# Altium PCB STM32-Flasher.PcbDoc
Units mil, origin at the board's own origin, x right, y up, seen from the top; angles counter-clockwise.
Board outline 2620 x 1320 mil, 2 copper layers (Top Layer, Bottom Layer); 21 components, 12 nets, 110 pads, 0 vias.
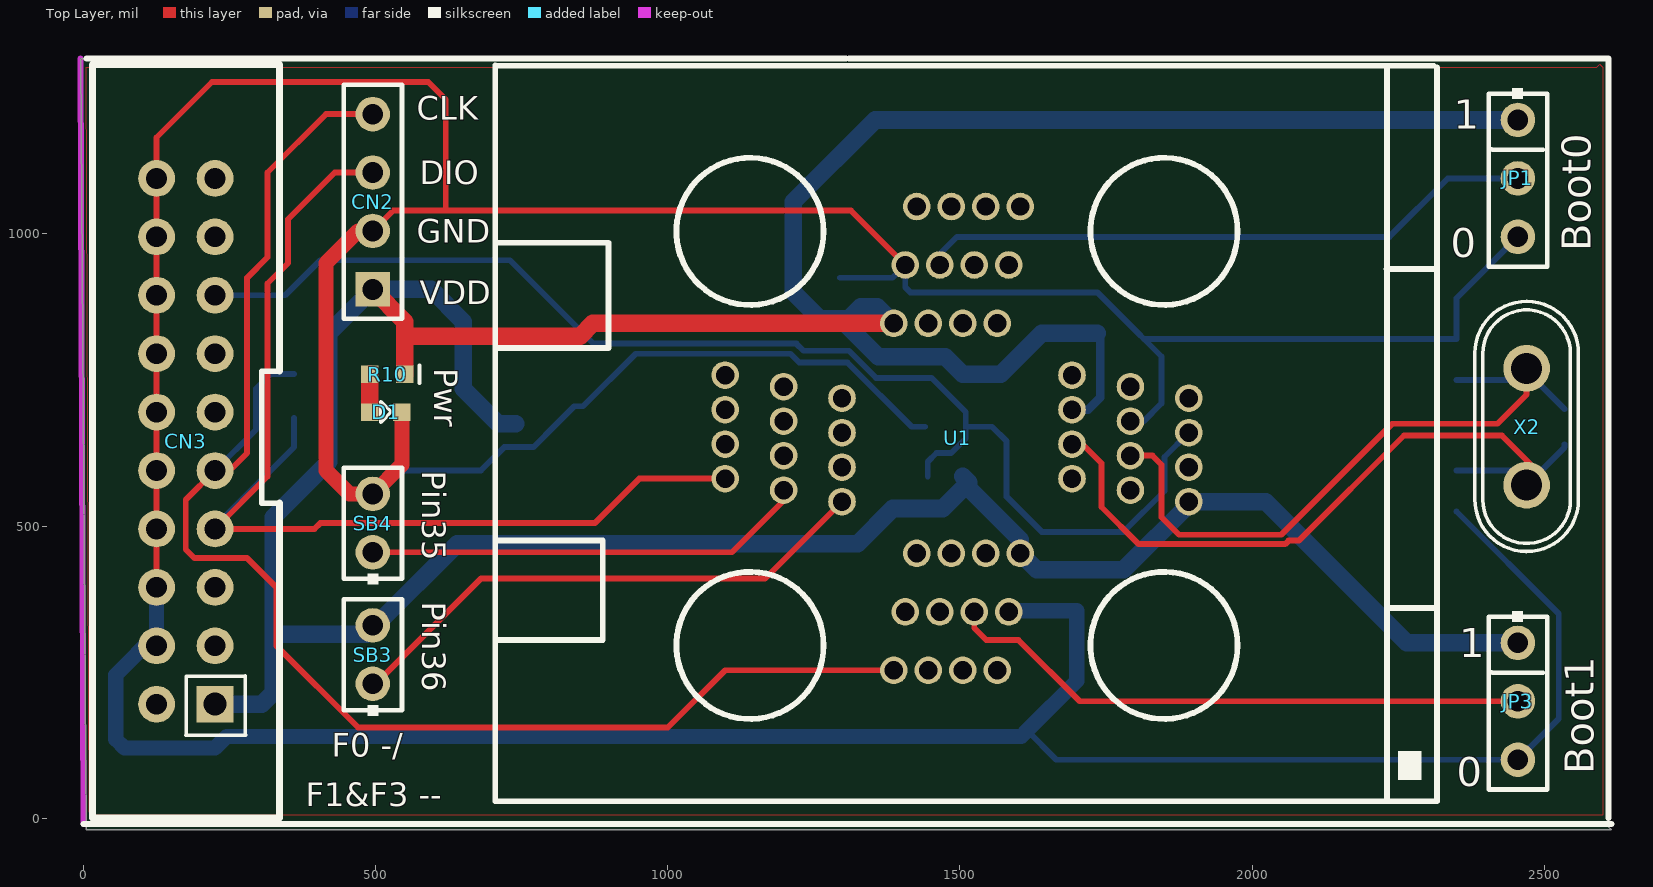
[diagram p0: Top Layer view]
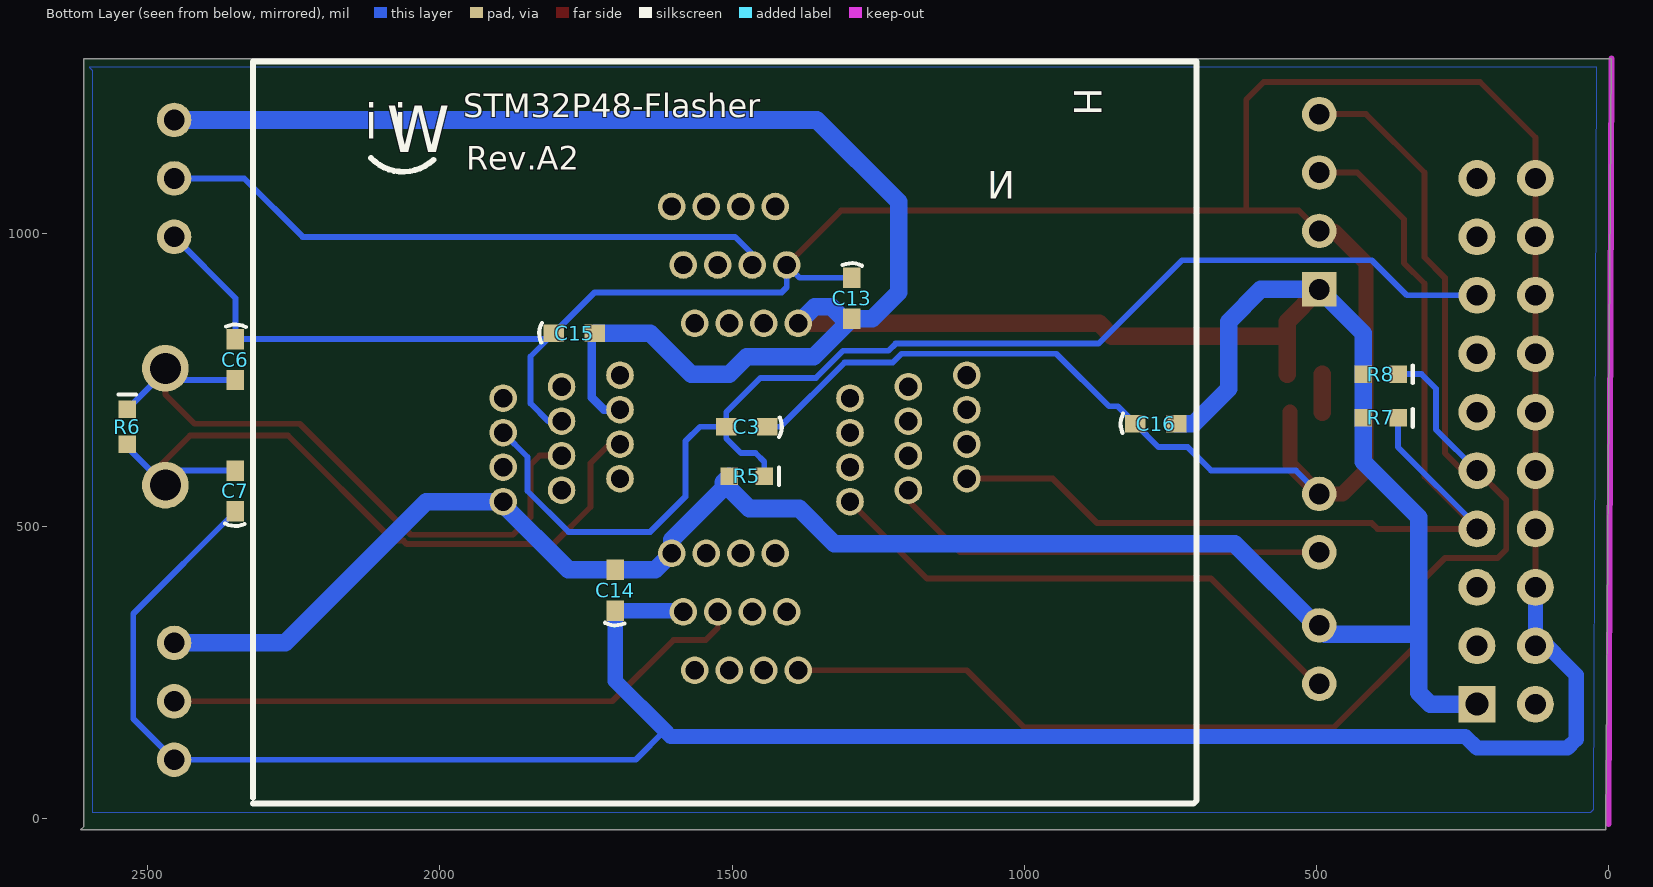
[diagram p1: Bottom Layer view, seen from below]
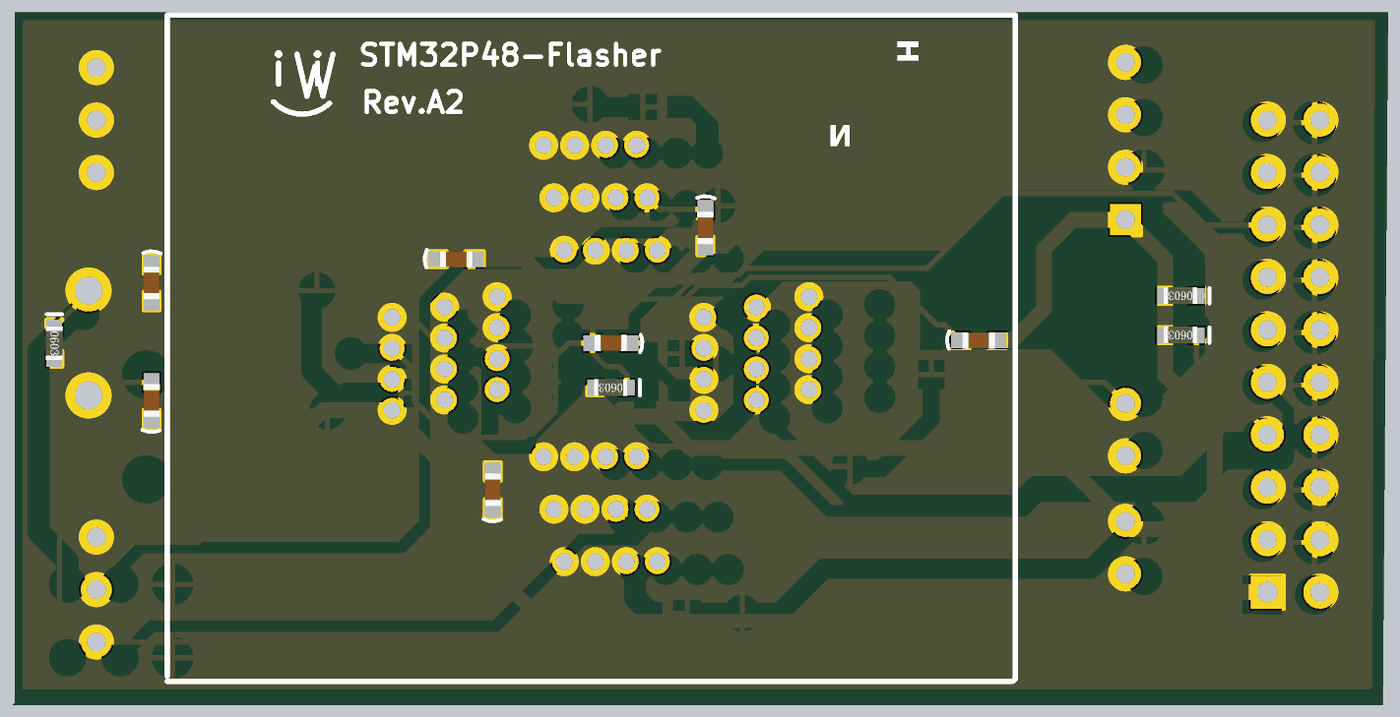
[diagram p2: 3D render of the assembled board from below, using the file's embedded part models]

## Layer stack, top to bottom
Top Solder: solder mask 0.4, Solder Resist, Dk 3.5
Top Layer: signal copper 1.4
Dielectric1: dielectric 12.6, FR-4, Dk 4.8
Bottom Layer: signal copper 1.4
Bottom Solder: solder mask 0.4, Solder Resist, Dk 3.5

## Board outline
-5,1300 2610,1300 2610,-15 2615,-20 5,-20

## Design rules (kind name [scope] priority, off if disabled: settings)
Clearance [All] p1: gap=6
PolygonConnect [All] p1: connectstyle=Relief reliefconductorwidth=10 reliefentries=4 polygonreliefangle="90 Angle" airgapwidth=10
RoomDefinition STM32-Flasher [InComponentClass('STM32-Flasher')] p1: confinementstyle=ConfineIn formatcopy=TRUE lockcomponents=FALSE outline 0,-20 2615,-20 2615,1305 0,1305
RoutingVias [All] p1: holewidth=12 width=25 viastyle="Through Hole" minholewidth=12 minwidth=25 maxholewidth=28 maxwidth=50
SolderMaskExpansion [All] p1: expansion=4
Width [All] p1: maxlimit=55 minlimit=7 preferedwidth=10
30 further rules are at their usual default settings.

## Components (designator, comment, footprint, x,y, rotation, side; value= is the part's Value field where it differs from the comment)
C3 "Cap" C0603L 1475,670 r0 bottom
C6 "Cap" C0603L 2350,785 r270 bottom
C7 "Cap" C0603L 2350,560 r90 bottom
C13 "Cap" C0603L 1295,890 r270 bottom
C14 "Cap" C0603L 1700,390 r90 bottom
C15 "Cap" C0603L 1770,830 r180 bottom
C16 "Cap" C0603L 775,675 r180 bottom
CN2 "HDR1x4" HDR1x4 495,905 r90 top
CN3 "JTAG 20Pin" DC3/20P/2.54MM 125,195 r90 top
D1 "LED1" 0603pn 490,695 r0 top
JP1 "Jumper3" HDR1X3/2.54MM 2455,1195 r270 top
JP3 "Jumper3" HDR1X3/2.54MM 2455,300 r270 top
R5 "10K" R0603 1475,585 r0 bottom
R6 "1M" R0603 2535,670 r270 bottom
R7 "10K" R0603 390,685 r0 bottom
R8 "10K" R0603 390,760 r0 bottom
R10 "1K5" R0603 520,760 r180 top
SB3 "Circuit Breaker" HDR1X2/2.54mm 495,230 r90 top
SB4 "Circuit Breaker" HDR1X2/2.54mm 495,455 r90 top
U1 "STM32F1" QFP48-Socket 1495,650 r90 top
X2 "8MHz" XTAL_socket 2470,670 r270 top

## Footprints (in the part's own frame and the unit in brackets; to place one, negate y for a bottom-side part, rotate by r counter-clockwise, add the part's x,y. Pads: shape width x height; smd on the part's side, far side on the other; paste and mask are expansions set on the pad)
0603pn [mil]
  rect 30x30 smd: 1(0,0) 2(55,0)
  silkscreen extent 19,-17 36,18
C0603L [mil]
  rect 35x30 smd: 1(-35,0) 2(35,0)
  silkscreen extent -60,-16 -56,18, body extent -31,-16 32,15, height 24
DC3/20P/2.54MM [mm]
  rect 1.6x1.6 hole 1 paste+0: 1(0,-2.54)
  round 1.6 hole 0.9 paste+0: 2(0,0) 3(2.54,-2.54) 4(2.54,0) 5(5.08,-2.54) 6(5.08,0) 7(7.62,-2.54) 8(7.62,0) 9(10.16,-2.54) 10(10.16,0) 11(12.7,-2.54) 12(12.7,0) 13(15.24,-2.54) 14(15.24,0) 15(17.78,-2.54) 16(17.78,0) 17(20.32,-2.54) 18(20.32,0) 19(22.86,-2.54) 20(22.86,0)
  silkscreen extent -4.95,-5.33 27.81,2.79
HDR1X2/2.54mm [mm]
  round 1.5 hole 0.9: 1(0,0) 2(2.54,0)
  silkscreen extent -1.4,-1.27 3.68,1.27
HDR1X3/2.54MM [mm]
  round 1.5 hole 0.9: 1(0,0) 2(2.54,0) 3(5.08,0)
  silkscreen extent -1.4,-1.27 6.38,1.27
HDR1x4 [mm] "Connector; Header; 4 Position"
  rect 1.5x1.5 hole 0.9: 1(0,0)
  round 1.5 hole 0.9: 2(2.54,0) 3(5.08,0) 4(7.62,0)
  silkscreen extent -1.27,-1.27 8.89,1.27
QFP48-Socket [mm]
  round 1.2 hole 0.8: 1(-2.75,-10.08) 2(-2.25,-7.54) 3(-1.75,-5) 4(-1.25,-10.08) 5(-0.75,-7.54) 6(-0.25,-5) 7(0.25,-10.08) 8(0.75,-7.54) 9(1.25,-5) 10(1.75,-10.08) 11(2.25,-7.54) 12(2.75,-5) 13(10.08,-2.75) 14(7.54,-2.25) 15(5,-1.75) 16(10.08,-1.25) 17(7.54,-0.75) 18(5,-0.25) 19(10.08,0.25) 20(7.54,0.75) 21(5,1.25) 22(10.08,1.75) 23(7.54,2.25) 24(5,2.75) 25(2.75,10.08) 26(2.25,7.54) 27(1.75,5) 28(1.25,10.08) 29(0.75,7.54) 30(0.25,5) 31(-0.25,10.08) 32(-0.75,7.54) 33(-1.25,5) 34(-1.75,10.08) 35(-2.25,7.54) 36(-2.75,5) 37(-10.08,2.75) 38(-7.54,2.25) 39(-5,1.75) 40(-10.08,1.25) 41(-7.54,0.75) 42(-5,0.25) 43(-10.08,-0.25) 44(-7.54,-0.75) 45(-5,-1.25) 46(-10.08,-1.75) 47(-7.54,-2.25) 48(-5,-2.75)
  silkscreen extent -15.78,-20.88 16.22,20.07
R0603 [mil]
  rect 30x30 smd: 1(-30,0) 2(30,0)
  silkscreen extent -55,-15 -55,15, body extent -31,-16 32,15, height 18
XTAL_socket [mil]
  round 80 hole 53: 1(100,0) 2(-100,0)
  silkscreen extent -215,-89 214,89

## Part data
C3 C6 C7 C13 C14 C15 C16: library part CAP, "Capacitor"
CN2: library part CON4
CN3: "20Pin JTAG CONNECTOR"
D1: "Typical RED GaAs LED"
R5 R6 R7 R8 R10: "Resistor"
U1: library part STM32F103CxT, "Cortex M3, 48-pin LQFP"
X2: library part CRYSTAL, "Crystal"

## Nets (pads, with @x,y where several pads share a name; then routed paths per layer and width w, separated by ;. In a path a pad name is that pad's centre, name@x,y a point inside that pad or via, vN(x,y) a via of type N, cw(c..) or ccw(c..) an arc to the next point about the centre after c; other vN are vias at no path point)
D3V3: C13.2 C14.2 C15.2 C16.2 CN2.1 CN3.1 JP1.1 JP3.1 R5.2 R7.2 R8.2 R10.1 SB3.2 U1.1 U1.9 U1.24 U1.48 | length 7102.8
  Top Layer w30: CN2.1 550,850 550,825 ; R10.1 550,825 ; U1.24 871.85,846.85 850,825 550,825
  Bottom Layer w15: U1.9 1719.21,699.21 1740,720 1740,825 C15.2
  Bottom Layer w30: CN3.1 305,195 325,215 325,315 ; C16.2 710,675 650,735 650,850 595,905 CN2.1 420,830 R8.2 R7.2 420,610 325,515 325,315 ; U1.24 1358.58,875 1330,875 1310,855 C13.2 ; R5.2 1515.47,574.53 1470.93,530 1385,530 1325,470 640,470 500,330 485,315 325,315 ; 1515.47,564.53 1603.27,476.73 U1.48 1631.42,425 C14.2 1780,425 1896.73,541.73 2023.27,541.73 2265,300 JP3.1 ; C15.2 1640,830 1570,760 1505,760 1475,790 1360,790 C13.2 ; JP1.1 1355,1195 1215,1055 1215,900 1260,855 C13.2
GND: C3.1 C6.1 C7.1 C13.1 C14.1 C15.1 C16.1 CN2.2 CN3.4 CN3.6 CN3.8 CN3.10 CN3.12 CN3.14 CN3.16 CN3.18 CN3.20 D1.2 JP1.3 JP3.3 SB4.2 U1.8 U1.23 U1.47 | length 9460.4
  Top Layer w10: CN3.6 CN3.8 CN3.10 CN3.12 CN3.14 CN3.16 CN3.18 CN3.20 125,1165 220,1260 590,1260 620,1230 620,1040 ; CN2.2 530,1040 620,1040 ; U1.23 1313.27,1040 620,1040
  Top Layer w26: CN2.2 470,1005 415,950 415,595 455,555 SB4.2 545,605 D1.2
  Bottom Layer w10: SB4.2 535,595 680,595 720,635 770,635 C16.1 840,705 855,705 945,795 1210,795 1225,780 1307.37,780 1417.37,670 C3.1 ; C13.1 1384.57,925 U1.23 1406.42,908.58 1415,900 1735,900 C15.1 C15.1@1815,820 ; 1615,150 1665,100 JP3.3 2525,170 2525,350 C7.1 ; U1.8 1814.53,679.53 1845,710 1845,790 C15.1@1815,820 ; JP1.3 2350,890 C6.1 C15.1@1815,820
  Bottom Layer w26: CN3.4 CN3.4@125,315 ; CN3.6 CN3.4@125,315 ; U1.47 1585.43,355 C14.1 1700,235 1615,150 1605,140 245,140 225,120 70,120 55,135 55,245 CN3.4@125,315
NetC6_2: C6.2 R6.1 U1.5 X2.2 | length 1156.6
  Top Layer w10: U1.5 1829.53,620.47 1845,605 1845,515 1875,485 2050,485 2240,675 2420,675 2470,725 X2.2
  Bottom Layer w10: C6.2 2450,750 X2.2 2470,765 R6.1
NetC7_2: C7.2 R6.2 U1.6 X2.1 | length 1262
  Top Layer w10: U1.6 1709.84,640.16 1742.5,607.5 1742.5,532.5 1806,469 2056.63,469 2062.63,475 2080,475 2260,655 2427.63,655 2481,601.63 X2.1@2481,570
  Bottom Layer w10: C7.2 2445,595 X2.1 2535,635 R6.2
NetD1_1: D1.1 R10.2 | length 65
  Top Layer w30: D1.1 R10.2
NetJP1_2: JP1.2 U1.20 | length 1061.8
  Bottom Layer w10: U1.20 1465.47,965.47 1495,995 2235,995 2335,1095 JP1.2
NetJP3_2: JP3.2 U1.44 | length 1010.1
  Top Layer w10: U1.44 1524.53,325.47 1545,305 1600,305 1705,200 JP3.2
NRST: C3.2 CN3.15 R5.1 U1.7 | length 2185.5
  Bottom Layer w10: CN3.15 345,895 405,955 730,955 872.77,812.23 1220,812.23 1232.23,800 1310,800 1356.39,753.61 1451.39,753.61 1510,695 C3.2 ; R5.1 1445,610 1460,625 1485,625 1510,650 C3.2 ; U1.7 1850,617.99 1850,560 1780,490 1640,490 1580,550 1580,645 1555,670 C3.2
PF6: SB4.1 U1.35 | length 757.9
  Top Layer w10: SB4.1 1110,455 1198.15,543.15 U1.35
PF7: SB3.1 U1.36 | length 927.3
  Top Layer w10: SB3.1@500,230 680,410 1166.42,410 U1.36
SWCLK: CN2.4 CN3.9 R8.1 U1.37 | length 2620.7
  Top Layer w10: CN2.4 415,1205 315,1105 315,960 280,925 280,625 250,595 CN3.9 175,545 175,460 190,445 280,445 330,395 330,295 470,155 1000,155 1098.15,253.15 U1.37
  Bottom Layer w10: CN3.9 295,665 295,735 320,760 R8.1
SWDIO: CN2.3 CN3.7 R7.1 U1.34 | length 1914.6
  Top Layer w10: CN2.3 430,1105 350,1025 350,950 315,915 315,585 CN3.7 395,495 405,505 875,505 951.1,581.1 U1.34
  Bottom Layer w10: CN3.7 225,500 360,635 R7.1
pads on no net: CN3.2 CN3.3 CN3.5 CN3.11 CN3.13 CN3.17 CN3.19 U1.2 U1.3 U1.4 U1.10 U1.11 U1.12 U1.13 U1.14 U1.15 U1.16 U1.17 U1.18 U1.19 U1.21 U1.22 U1.25 U1.26 U1.27 U1.28 U1.29 U1.30 U1.31 U1.32 U1.33 U1.38 U1.39 U1.40 U1.41 U1.42 U1.43 U1.45 U1.46

## Polygon pours and split planes (outlines as drawn)
GND on Top Layer "Top Layer-No Net" (solid, remove dead copper, shelved, pour order 2): 5,1285 2590,1285 2595,1290 2600,1285 2600,5 20,5 10,15 10,10
GND on Bottom Layer "Top Layer-No Net" (solid, remove dead copper, shelved, pour order 4): 20,1285 2600,1285 2595,1280 2595,10 30,10 25,15

## Keep-outs
Keep-Out Layer:
  lines w10: -5,1300 0,-10

## Silkscreen, mask and mechanical layers (free items; w line width, h text height)
Top Overlay:
  lines w10: 0,-10 2615,-10 ; 5,1300 1305,1300 ; 1310,1300 2610,1300 2610,0
  text "CLK" at 570,1195 h40
  text "1" at 2345,1180 h50
  text "DIO" at 575,1085 h40
  text "GND" at 570,985 h40
  text "Boot0" at 2580,970 h50 r90
  text "0" at 2340,960 h50
  text "VDD" at 575,880 h40
  text "Pwr" at 600,770 h40 r270
  text "Pin35" at 580,595 h40 r270
  text "Pin36" at 580,370 h40 r270
  text "1" at 2355,275 h50
  text "F0 -/" at 425,105 h40
  text "Boot1" at 2585,75 h50 r90
  text "0" at 2350,55 h50
  text "F1&F3 --" at 380,20 h40
Bottom Overlay:
  lines w10: 2011,1127 ccw(c2063,1182) 2118,1130
  text "H" at 930,1250 h80 r90
  text "STM32P48-Flasher" at 1960,1200 h40
  text "i i" at 2129,1163 h60
  text "W" at 2091,1140 h80
  text "Rev.A2" at 1955,1110 h40
  text "N" at 1015,1045 h80